# Altium PCB Mach trai tim (old).PcbDoc
Units mm, origin at the board's own origin, x right, y up, seen from the top; angles counter-clockwise.
Board outline 100.05 x 83.5 mm, 2 copper layers (Top Layer, Bottom Layer); 28 components, 26 nets, 81 pads, 4 vias.
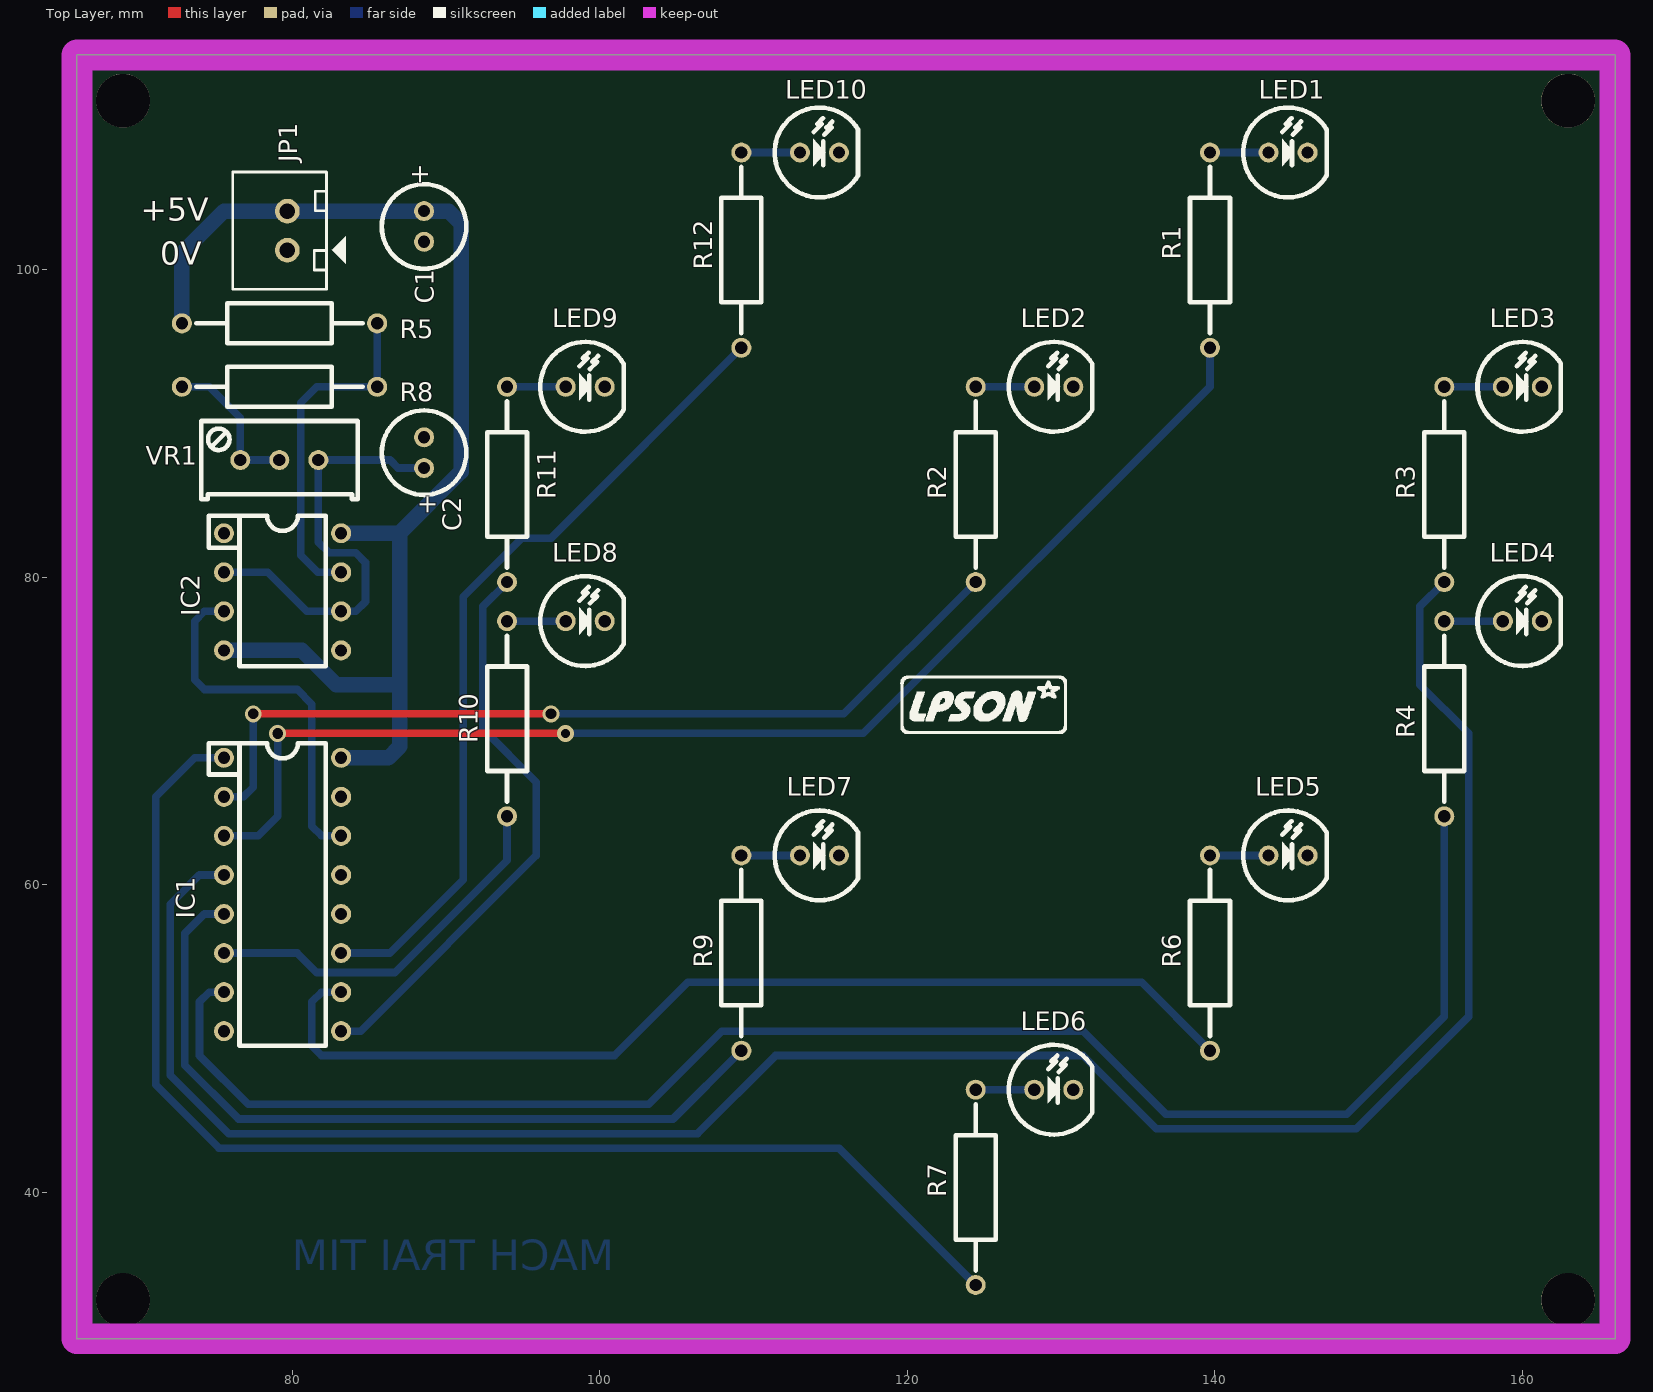
[diagram p0: Top Layer view]
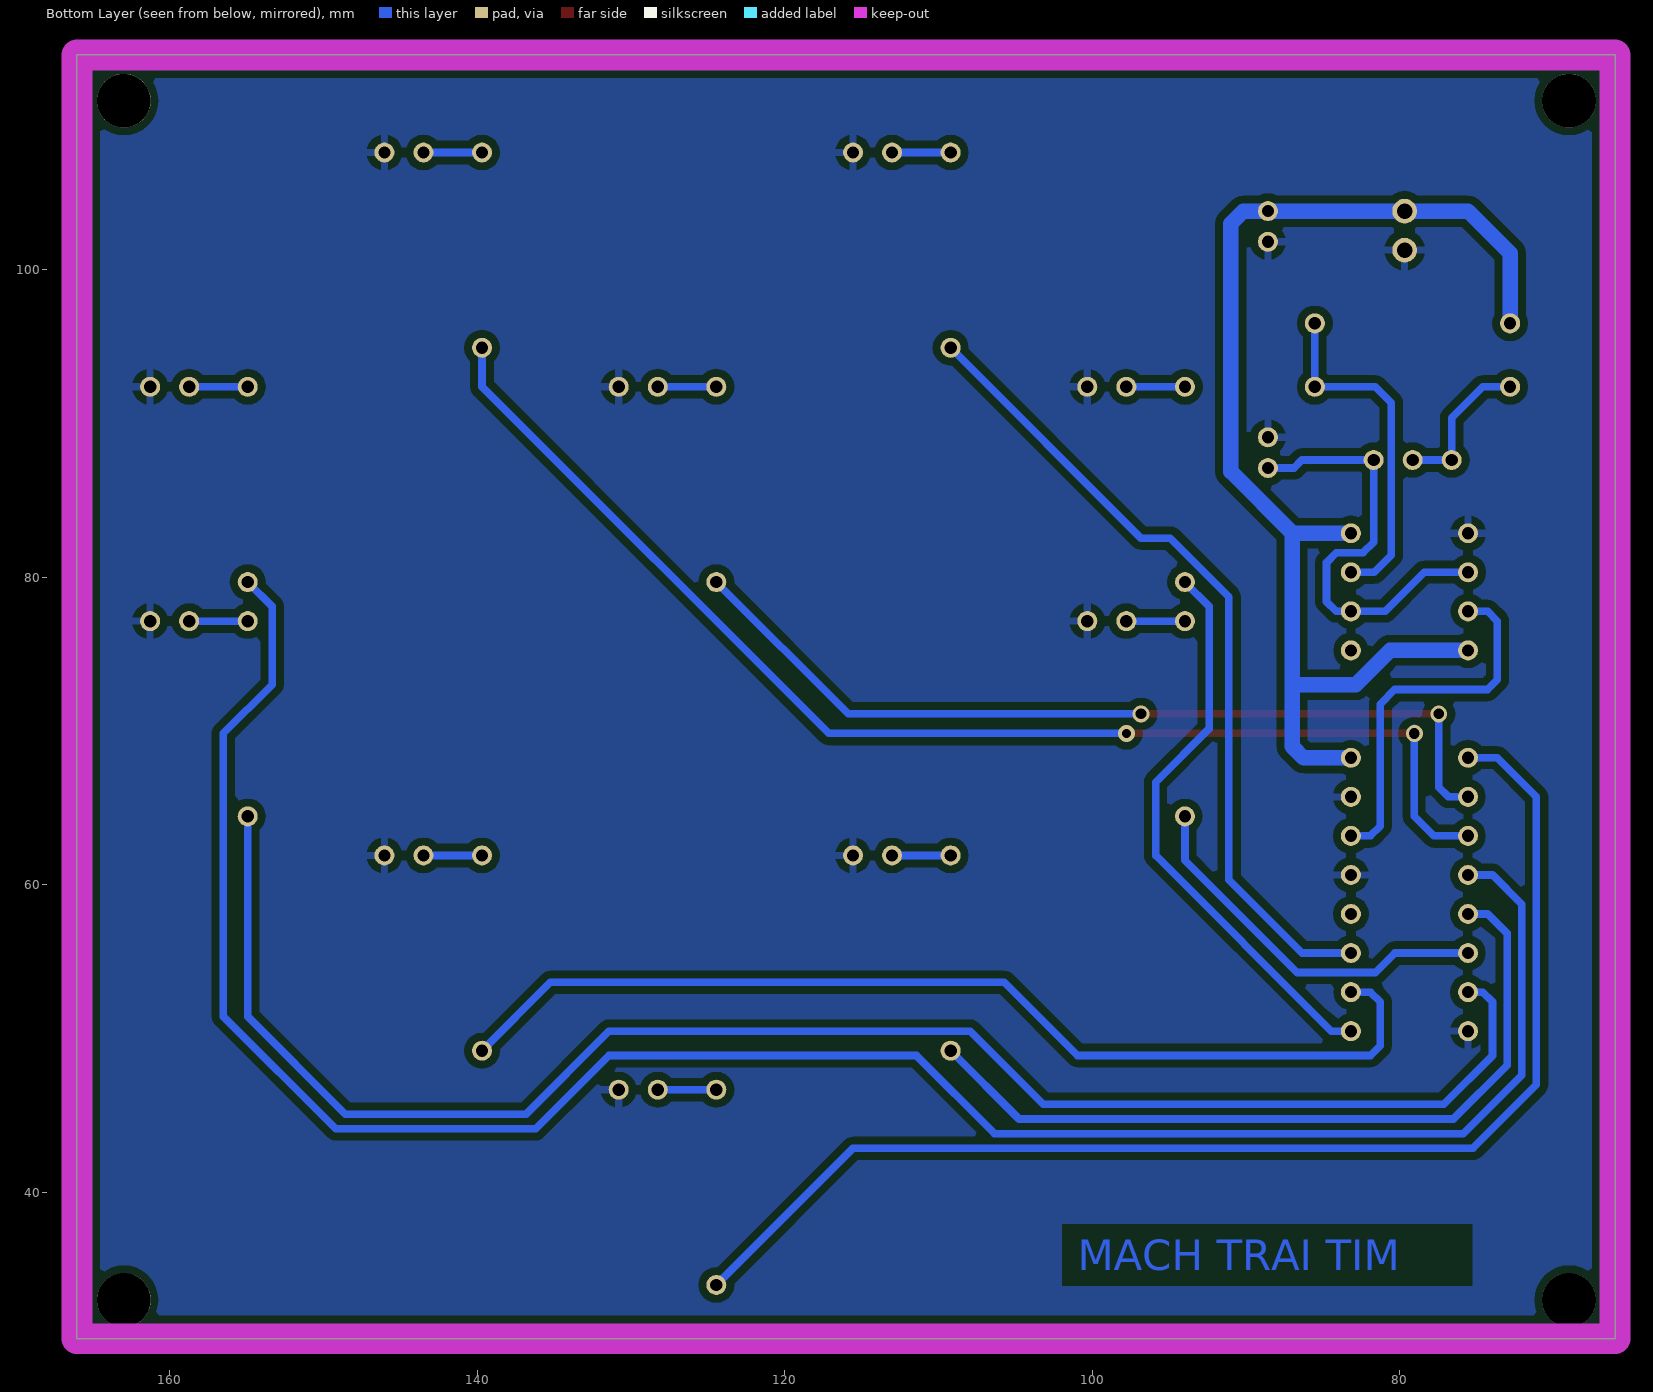
[diagram p1: Bottom Layer view, seen from below]
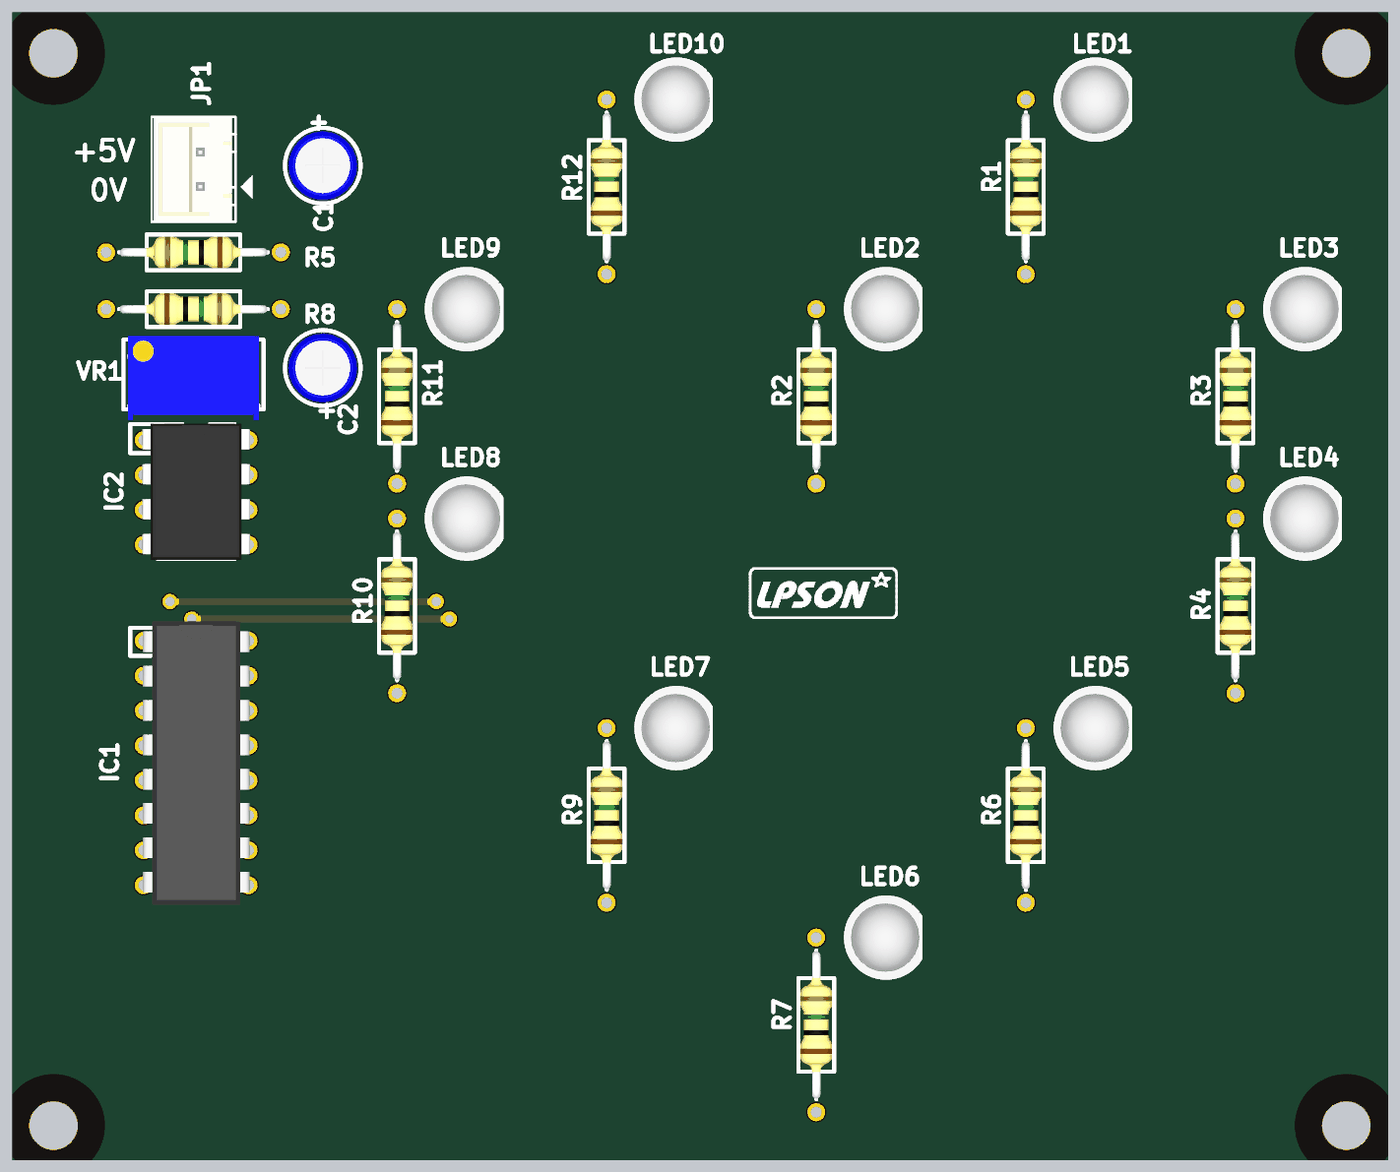
[diagram p2: 3D render of the assembled board from above, using the file's embedded part models]

## Layer stack, top to bottom
Top Layer: signal copper 0.0356
Dielectric: dielectric 0.32, FR-4, Dk 4.8
Bottom Layer: signal copper 0.0356

## Board outline
66,30.48 166.052,30.48 166.052,113.983 66,113.983

## Design rules (kind name [scope] priority, off if disabled: settings)
Clearance [All] p1: gap=0.5
PlaneConnect [All] p1: planeconnectstyle=Relief reliefexpansion=0.5 reliefentries=4 reliefconductorwidth=0.5 reliefairgap=0.254
PolygonConnect [All] p1: connectstyle=Relief reliefconductorwidth=0.5 reliefentries=4 polygonreliefangle="90 Angle" airgapwidth=0.5
RoutingVias [All] p1: holewidth=0.3 width=0.7 viastyle="Through Hole" minholewidth=0.3 minwidth=0.7 maxholewidth=0.6 maxwidth=1.1
SolderMaskExpansion [All] p1: expansion=0.102
Width [All] p1: maxlimit=1.5 minlimit=0.5 preferedwidth=0.5
27 further rules are at their usual default settings.

## Components (designator, comment, footprint, x,y, rotation, side; value= is the part's Value field where it differs from the comment)
C1 "GSR10M016-0511TAF" CAP_1UF_50V 88.582,103.822 r270 top
C2 "GSR10M016-0511TAF" CAP_1UF_50V 88.582,87.108 r90 top
IC1 "4017" 74HC4017 79.375,59.372 r270 top
IC2 "LM555" LM555 75.565,82.867 r270 top
JP1 "JP2" CON2 79.692,102.552 r90 top
LED1 "LED_R_5" LED5R 143.51,107.632 r0 top
LED2 "LED_R_5" LED5R 128.27,92.392 r0 top
LED3 "LED_R_5" LED5R 158.75,92.392 r0 top
LED4 "LED_R_5" LED5R 158.75,77.153 r0 top
LED5 "LED_R_5" LED5R 143.51,61.912 r0 top
LED6 "LED_R_5" LED5R 128.27,46.672 r0 top
LED7 "LED_R_5" LED5R 113.03,61.912 r0 top
LED8 "LED_R_5" LED5R 97.79,77.153 r0 top
LED9 "LED_R_5" LED5R 97.79,92.392 r0 top
LED10 "LED_R_5" LED5R 113.03,107.632 r0 top
R1 "CF1/4W1KJ25" "RES 1/4W CFR25" 139.7,94.932 r90 top
R2 "CF1/4W1KJ25" "RES 1/4W CFR25" 124.46,79.692 r90 top
R3 "CF1/4W1KJ25" "RES 1/4W CFR25" 154.94,79.692 r90 top
R4 "CF1/4W1KJ25" "RES 1/4W CFR25" 154.94,64.453 r90 top
R5 "CF1/4W1KJ25" "RES 1/4W CFR25" 85.531,96.52 r180 top
R6 "CF1/4W1KJ25" "RES 1/4W CFR25" 139.7,49.212 r90 top
R7 "CF1/4W1KJ25" "RES 1/4W CFR25" 124.46,33.972 r90 top
R8 "CF1/4W1KJ25" "RES 1/4W CFR25" 72.831,92.392 r0 top
R9 "CF1/4W1KJ25" "RES 1/4W CFR25" 109.22,49.212 r90 top
R10 "CF1/4W1KJ25" "RES 1/4W CFR25" 93.98,64.453 r90 top
R11 "CF1/4W1KJ25" "RES 1/4W CFR25" 93.98,79.692 r90 top
R12 "CF1/4W1KJ25" "RES 1/4W CFR25" 109.22,94.932 r90 top
VR1 "10K" VR1 76.628,87.63 r0 top

## Footprints (in the part's own frame and the unit in brackets; to place one, negate y for a bottom-side part, rotate by r counter-clockwise, add the part's x,y. Pads: shape width x height; smd on the part's side, far side on the other; paste and mask are expansions set on the pad)
74HC4017 [mm] "DIP 16, 16 PIN, W 7.62, Pin to pin 2.54MM"
  round 1.3 hole 0.8: 1(-8.89,-3.81) 2(-6.35,-3.81) 3(-3.81,-3.81) 4(-1.27,-3.81) 5(1.27,-3.81) 6(3.81,-3.81) 7(6.35,-3.81) 8(8.89,-3.81) 9(8.89,3.81) 10(6.35,3.81) 11(3.81,3.81) 12(1.27,3.81) 13(-1.27,3.81) 14(-3.81,3.81) 15(-6.35,3.81) 16(-8.89,3.81)
  silkscreen extent -9.84,-4.8 9.84,2.8, body extent -10.3,-3.88 10.3,3.88, height 4.5
CAP_1UF_50V [mm] "Capacitor, Electrolytic, Radial; Body 5 x 11 mm (Dia.xH typ); Pin Spacing 2 mm (typ)"
  round 1.3 hole 0.8: 1(0,0) 2(2,0)
  silkscreen extent -1.75,-2.75 3.75,2.75, body extent -1.53,-2.53 3.53,2.53, height 11.53
CON2 [mm] "CON2"
  round 1.6 hole 1 mask+0.1: 1(-1.27,0) 2(1.27,0)
  silkscreen extent -3.81,-3.8 3.81,3.56, body extent -3.75,-2.29 3.75,3.41, height 7
LED5R [mm] "LED, RED, 2 LEAD, 5mm"
  round 1.3 hole 0.8: 1(0,0) 2(2.54,0)
  silkscreen extent -1.65,-2.92 3.77,2.92, body extent -1.71,-3.01 3.71,3.01, height 12.31
LM555 [mm] "DIP 8, 8 PIN, W 7.62, Pin to pin 2.54MM"
  round 1.3 hole 0.8: 1(0,0) 2(2.54,0) 3(5.08,0) 4(7.62,0) 5(7.62,7.62) 6(5.08,7.62) 7(2.54,7.62) 8(0,7.62)
  silkscreen extent -1.15,-0.99 8.65,6.61, body extent -1.2,-0.1 8.7,7.72, height 4.57
"RES 1/4W CFR25" [mm] "Axial Device, Thru-Hole; 2 Leads fi 0.55"
  round 1.3 hole 0.8 mask+0.1: 1(0,0) 2(12.7,0)
  silkscreen extent 0.94,-1.3 11.76,1.3, body extent 0.97,-1.16 11.74,1.16, height 2.93
VR1 [mm] "Variable Resistor"
  round 1.3 hole 0.8 mask+0.1: 1(0,0) 2(2.54,0) 3(5.08,0)
  silkscreen extent -2.54,-2.54 7.65,2.54, body extent -2.22,-3.3 7.3,2.79, height 11.56

## Part data
C1 C2: "CAP GSR 0511 10uF 16V 20%"
IC1: "Decade Counter/Divider with 10 Decoded Outputs"
IC2: "Timer"
JP1: library part Con2, "Connector 2"
LED1 LED2 LED3 LED4 LED5 LED6 LED7 LED8 LED9 LED10: library part LED_RED_5MM, "LED Red 5mm"
R1 R2 R3 R4 R5 R6 R7 R8 R9 R10 R11 R12: "RES CF AXIAL-0.3 5% 1/4W 1K"
VR1: library part VR2, "Var Resistor"

## Free pads (board coordinates)
  round 3.5 hole 3.5 mask+2: hole1(69,33) hole2(163,33) hole3(163,111) hole4(69,111)

## Via types
v1: diameter 1.1, hole 0.7, Top Layer to Bottom Layer, 3 vias
v2: diameter 1.1, hole 0.6, Top Layer to Bottom Layer, 1 vias

## Nets (pads, with @x,y where several pads share a name; then routed paths per layer and width w, separated by ;. In a path a pad name is that pad's centre, name@x,y a point inside that pad or via, vN(x,y) a via of type N, cw(c..) or ccw(c..) an arc to the next point about the centre after c; other vN are vias at no path point)
GND: C1.2 C2.2 IC1.8 IC1.13 IC1.15 IC2.1 JP1.1 LED1.2 LED2.2 LED3.2 LED4.2 LED5.2 LED6.2 LED7.2 LED8.2 LED9.2 LED10.2
NetC2_1: C2.1 IC2.2 IC2.6 VR1.3 | length 29.1
  Bottom Layer w0.5: IC2.2 78.422,80.328 80.962,77.787 IC2.6 84.138,77.787 84.772,78.422 84.772,80.962 84.138,81.597 82.403,81.597 81.708,82.292 VR1.3 86.37,87.63 86.892,87.108 C2.1
NetIC1_1: IC1.1 R7.1 | length 83
  Bottom Layer w0.5: IC1.1 73.66,68.263 71.12,65.722 71.12,46.99 75.248,42.862 115.57,42.862 R7.1
NetIC1_2: IC1.2 R2.1 | length 57.5
  Top Layer w0.5: v1(77.47,71.12) v1(96.837,71.12)
  Bottom Layer w0.5: IC1.2 76.835,65.722 77.47,66.358 v1(77.47,71.12) ; v1(96.837,71.12) 115.887,71.12 R2.1
NetIC1_3: IC1.3 R1.1 | length 82.3
  Top Layer w0.5: v1(79.057,69.85) v2(97.79,69.85)
  Bottom Layer w0.5: IC1.3 77.787,63.182 79.057,64.453 v1(79.057,69.85) v1@79.057,70.168 ; v2(97.79,69.85) 117.157,69.85 139.7,92.392 R1.1
NetIC1_4: IC1.4 R3.1 | length 138.8
  Bottom Layer w0.5: IC1.4 73.977,60.642 72.072,58.737 72.072,47.625 75.882,43.815 106.362,43.815 111.442,48.895 131.445,48.895 136.207,44.133 149.225,44.133 156.528,51.435 156.528,69.85 153.352,73.025 153.352,78.105 R3.1
NetIC1_5: IC1.5 R9.1 | length 51.1
  Bottom Layer w0.5: IC1.5 74.295,58.102 73.025,56.832 73.025,48.26 76.517,44.767 104.775,44.767 R9.1
NetIC1_6: IC1.6 R10.1 | length 24.8
  Bottom Layer w0.5: IC1.6 80.328,55.562 81.597,54.292 86.677,54.292 93.98,61.595 R10.1
NetIC1_7: IC1.7 R4.1 | length 107.5
  Bottom Layer w0.5: IC1.7 74.612,53.023 73.977,52.387 73.977,48.895 77.153,45.72 103.188,45.72 107.95,50.482 131.445,50.482 136.843,45.085 148.59,45.085 154.94,51.435 R4.1
NetIC1_9: IC1.9 R11.1 | length 37.3
  Bottom Layer w0.5: IC1.9 84.455,50.482 95.885,61.912 95.885,66.675 92.392,70.168 92.392,78.105 R11.1
NetIC1_10: IC1.10 R6.1 | length 67.5
  Bottom Layer w0.5: IC1.10 81.915,53.023 81.28,52.387 81.28,49.53 81.915,48.895 100.965,48.895 105.727,53.657 135.255,53.657 R6.1
NetIC1_11: IC1.11 R12.1 | length 53.1
  Bottom Layer w0.5: IC1.11 86.36,55.562 91.123,60.325 91.123,78.74 94.932,82.55 96.837,82.55 R12.1
NetIC1_14: IC1.14 IC2.3 | length 24.4
  Bottom Layer w0.5: IC2.3 74.295,77.787 73.66,77.153 73.66,73.343 74.295,72.707 80.328,72.707 81.28,71.755 81.28,63.817 81.915,63.182 IC1.14
NetIC2_7: IC2.7 R5.1 R8.2 | length 22.5
  Bottom Layer w0.5: IC2.7 81.673,80.328 80.554,81.446 80.554,91.349 81.597,92.392 R8.2 R5.1
NetLED1_1: LED1.1 R1.2 | length 3.8
  Bottom Layer w0.5: R1.2 LED1.1
NetLED2_1: LED2.1 R2.2 | length 3.8
  Bottom Layer w0.5: R2.2 LED2.1
NetLED3_1: LED3.1 R3.2 | length 3.8
  Bottom Layer w0.5: R3.2 LED3.1
NetLED4_1: LED4.1 R4.2 | length 3.8
  Bottom Layer w0.5: R4.2 LED4.1
NetLED5_1: LED5.1 R6.2 | length 3.8
  Bottom Layer w0.5: R6.2 LED5.1
NetLED6_1: LED6.1 R7.2 | length 3.8
  Bottom Layer w0.5: R7.2 LED6.1
NetLED7_1: LED7.1 R9.2 | length 3.8
  Bottom Layer w0.5: R9.2 LED7.1
NetLED8_1: LED8.1 R10.2 | length 3.8
  Bottom Layer w0.5: R10.2 LED8.1
NetLED9_1: LED9.1 R11.2 | length 3.8
  Bottom Layer w0.5: R11.2 LED9.1
NetLED10_1: LED10.1 R12.2 | length 3.8
  Bottom Layer w0.5: R12.2 LED10.1
NetR8_1: R8.1 VR1.1 VR1.2 | length 9.9
  Bottom Layer w0.5: R8.1 74.612,92.392 76.628,90.377 VR1.1 VR1.2
VCC: C1.1 IC1.16 IC2.4 IC2.8 JP1.2 R5.2 | length 80.2
  Bottom Layer w1: R5.2 72.831,101.088 75.565,103.822 JP1.2 C1.1 90.177,103.822 91,103 91,86.872 86.995,82.867 ; IC2.4 80.645,75.248 82.867,73.025 87,73.025 ; IC1.16 86.263,68.263 87,69 87,73.025 ; IC2.8 86.995,82.867 ; 86.995,82.867 87,82.862 87,73.025
pads on no net: IC1.12 IC2.5

## Polygon pours and split planes (outlines as drawn)
GND on Bottom Layer "Bottom Overlay-No Net" (solid, pour order 5): 66,113.983 165.735,113.983 165.735,30.797 166.052,30.48 165.735,30.797 66,30.797 66,113.983

## Keep-outs
Keep-Out Layer:
  the board outline again, w2

## Other copper
Bottom Layer:
  text "MACH TRAI TIM" at 100.965,34.925 h2

## Silkscreen, mask and mechanical layers (free items; w line width, h text height)
Top Overlay:
  drawing of 892 lines, arcs and shapes, not listed
  text "+5V" at 70.168,103.188 h1.5
  text "0V" at 71.438,100.33 h1.5

## Text inside footprints (layer, text, board x,y; h text height)
C1: Top Overlay "+" at 87.82,106.886 h1.2 r270; Mechanical 1 "2" at 88.083,102.122 h1 r270; Mechanical 1 "1" at 88.083,104.022 h1 r270; Mechanical 1 "+" at 88.083,105.322 h1 r270
C2: Top Overlay "+" at 89.344,84.044 h1.2 r90; Mechanical 1 "2" at 89.082,88.808 h1 r90; Mechanical 1 "1" at 89.082,86.908 h1 r90; Mechanical 1 "+" at 89.082,85.608 h1 r90
IC1: Mechanical 1 "1" at 76.475,68.512 h1 r270; Mechanical 1 "8" at 76.435,50.962 h1 r270; Mechanical 1 "9" at 81.255,50.802 h1 r270; Mechanical 1 "16" at 81.375,68.612 h1 r270
IC2: Mechanical 1 "1" at 76.475,83.117 h1 r270; Mechanical 1 "4" at 76.475,75.617 h1 r270; Mechanical 1 "5" at 81.375,75.617 h1 r270; Mechanical 1 "8" at 81.375,83.217 h1 r270
VR1: Mechanical 1 "3" at 81.398,87.12 h1; Mechanical 1 "2" at 78.868,87.1 h1; Mechanical 1 "1" at 76.488,87.14 h1